# Altium PCB PCB2.PcbDoc (part 2 of 2)
Units mm, origin at the board's own origin, x right, y up, seen from the top; angles counter-clockwise.
Board outline 158 x 54 mm, 2 copper layers (Top Layer, Bottom Layer); 125 components, 171 nets, 620 pads, 62 vias.
Unrouted connection lines stored in the file: 120.
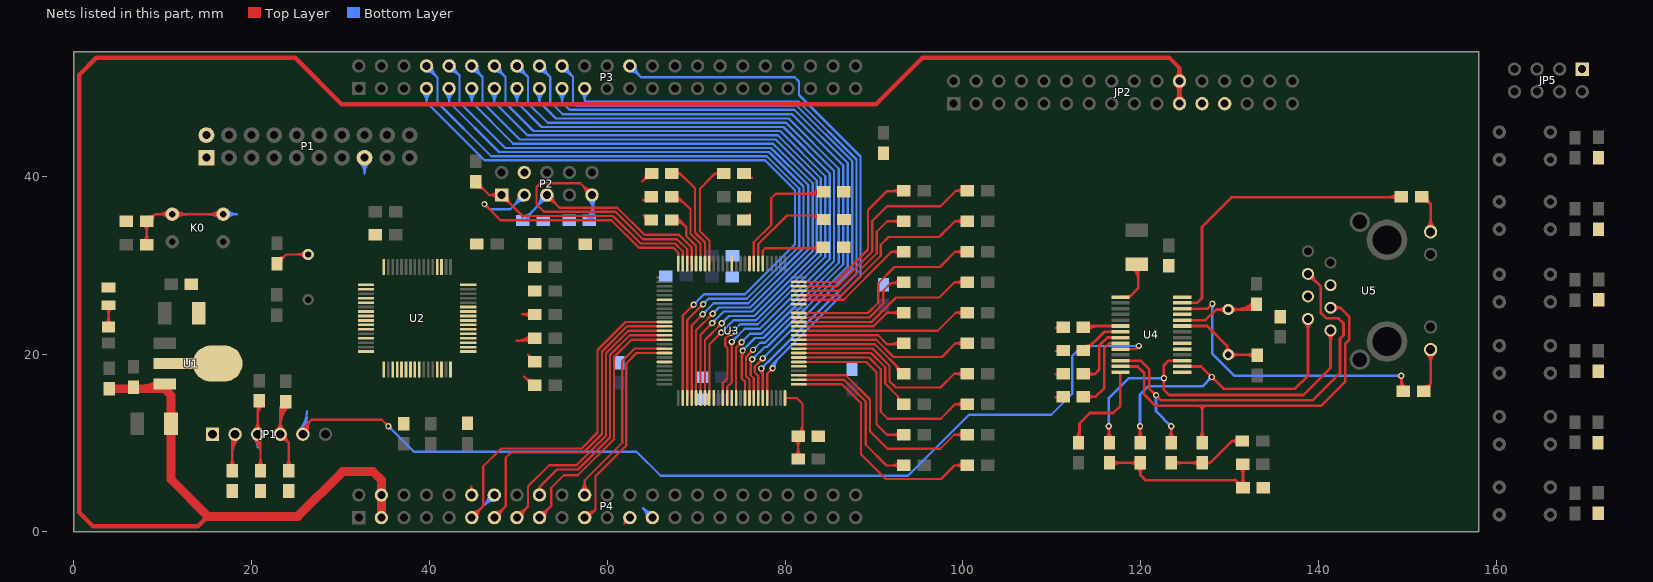
[diagram p2: the nets of this part, all layers, seen from the top]

## Via types
v1: diameter 0.7, hole 0.4, Top Layer to Bottom Layer, 62 vias

## Nets (pads, with @x,y where several pads share a name; then routed paths per layer and width w, separated by ;. In a path a pad name is that pad's centre, name@x,y a point inside that pad or via, vN(x,y) a via of type N, cw(c..) or ccw(c..) an arc to the next point about the centre after c; other vN are vias at no path point) (continued)
NetC11_2: C11.2 U2.5 Y1.2 | length 8.4
  Top Layer w0.254: C11.2@22.87,30.164 23.906,31.2 ; C11.2@22.879,30.545 ccw(c22.908,31.372) C11.2@23.493,30.787 ; C11.2@22.888,30.799 ccw(c22.935,32.171) 23.906,31.2 ; C11.2@23.378,30.291 cw(c24.298,30.291) 23.647,30.941 ; Y1.2@26.011,30.841 ccw(c25.144,29.974) 25.144,31.2 ccw(c25.144,32.426) Y1.2@26.011,31.559 ; Y1.2@26.37,31.2 23.906,31.2
NetC13_1: C13.1 U4.1 | length 9
  Top Layer w0.3: U4.1@117.705,26.405 118.725,26.405 119.71,27.39 119.71,29.959 C13.1@119.565,30.105 ; U4.1@118.53,26.455 ccw(c118.53,27.046) 118.948,26.628 ; C13.1@119.132,29.672 cw(c117.736,28.276) 119.71,28.276 ; C13.1@119.344,29.884 cw(c118.46,29) 119.71,29 ; 119.71,28.978 cw(c120.691,28.978) C13.1@119.997,29.672
NetC14_1: C14.1 U4.24 Y2.1 | length 17.6
  Top Layer w0.3: U4.24@124.655,23.805 127.295,23.805 128.5,25.01 132.41,25.01 C14.1@133.01,25.61 ; Y2.1@129.497,24.667 ccw(c128.669,23.839) 128.669,25.01 ccw(c128.669,26.181) Y2.1@129.497,25.353 ; Y2.1@130.183,24.667 cw(c131.011,23.839) 131.011,25.01 cw(c131.011,26.181) Y2.1@130.183,25.353 ; 130.697,25.01 ccw(c130.697,27.796) C14.1@132.667,25.826 ; 131.421,25.01 ccw(c131.421,27.072) C14.1@132.879,25.614 ; 132.146,25.01 ccw(c132.146,26.347) C14.1@133.091,25.402
NetC15_1: C15.1 U4.23 Y2.2 | length 15.5
  Top Layer w0.3: U4.23@124.43,23.11 124.475,23.155 127.475,23.155 129.72,20.91 ; Y2.2@129.497,20.273 ccw(c128.959,20.811) 129.72,20.811 ; Y2.2@130.057,20.364 cw(c130.331,20.91) 129.72,20.91 ; Y2.2@130.183,19.587 cw(c131.011,18.759) 131.011,19.93 cw(c131.011,21.101) Y2.2@130.183,20.273 ; 131.774,19.93 cw(c131.774,18.554) C15.1@132.747,19.527 ; 132.064,19.93 ccw(c132.064,20.896) C15.1@132.747,20.213 ; C15.1@133.09,19.87 133.03,19.93 Y2.2@129.84,19.93 129.72,20.05 129.72,20.91
NetC25_2: C25.2 L1.2 R38.1 R39.1 | length 30.4
  Top Layer w0.3: R38.1@116.473,7.758 R39.1@119.948,7.758 119.948,6.402 120.56,5.79 130.673,5.79 L1.2@131.496,4.968 131.496,7.548 C25.2@131.454,7.59 ; R38.1@116.816,7.415 cw(c117.643,6.588) 117.643,7.758 cw(c117.643,8.929) R38.1@116.816,8.101 ; R39.1@119.605,7.288 cw(c118.777,6.461) 119.948,6.461 cw(c121.118,6.461) R39.1@120.291,7.288 ; R39.1@119.605,7.415 ccw(c118.777,6.588) 118.777,7.758 ccw(c118.777,8.929) R39.1@119.605,8.101 ; 130.61,5.853 cw(c129.918,5.161) L1.2@130.888,5.032 ; 130.757,5.706 ccw(c131.369,6.317) L1.2@131.369,5.453 ; C25.2@131.111,7.247 cw(c130.183,6.319) 131.496,6.319 ; L1.2@131.153,5.311 ccw(c130.325,6.138) 131.496,6.138 ccw(c132.666,6.138) L1.2@131.839,5.311 ; 131.496,6.52 cw(c132.524,6.52) C25.2@131.797,7.247
NetC26_2: C26.2 R40.1 R41.1 | length 15.4
  Top Layer w0.3: R41.1@123.423,7.758 126.658,7.758 126.67,7.77 127.8,7.77 ; R41.1@123.766,7.415 cw(c124.593,6.588) 124.593,7.758 cw(c124.593,8.929) R41.1@123.766,8.101 ; R40.1@126.555,7.415 ccw(c125.727,6.588) 125.727,7.758 ccw(c125.727,8.929) R40.1@126.555,8.101 ; R40.1@127.297,8.034 ccw(c127.8,8.382) 127.8,7.77 ; R40.1@127.307,7.499 cw(c127.8,7.187) 127.8,7.77 ; C26.2@130.929,9.894 ccw(c130.24,9.301) 130.24,10.21 ; C26.2@130.929,10.526 cw(c130.24,11.119) 130.24,10.21 ; C26.2@131.424,10.21 130.24,10.21 ; 127.8,7.77 130.24,10.21
NetJP1_2: JP1.2 R14.1 | length 11.1
  Top Layer w0.254: R14.1@17.473,7.368 ccw(c16.606,8.235) 17.832,8.235 ccw(c19.059,8.235) R14.1@18.192,7.368 ; JP1.2@17.709,10.539 cw(c17.413,10.243) 17.832,10.243 ; R14.1@17.832,6.882 17.832,10.662 JP1.2@18.15,10.98 ; 17.832,8.709 cw(c20.421,8.709) JP1.2@18.591,10.539 ; 17.832,9.322 cw(c19.808,9.322) JP1.2@18.411,10.719 ; 17.832,9.936 cw(c19.194,9.936) JP1.2@18.231,10.899
NetLED1_1: LED1.1 R67.1 | length 5.7
  Top Layer w0.3: LED1.1@3.592,23.358 ccw(c2.775,24.175) 3.93,24.175 ; R67.1@3.647,25.207 cw(c2.964,24.524) 3.93,24.524 cw(c4.896,24.524) R67.1@4.213,25.207 ; LED1.1@3.91,23.04 3.93,23.06 R67.1@3.93,25.49 ; 3.93,24.078 ccw(c4.948,24.078) LED1.1@4.228,23.358
NetR5_1: R5.1 U2.36 | length 0.6
  Top Layer w0.254: 110.428,20.337 ccw(c110.428,21.015) R5.1@110.94,20.569 ; R5.1@111.013,20.337 R5.1@111.06,20.29
NetR6_1: R6.1 U2.35 | length 0.7
  Top Layer w0.254: 110.422,22.94 ccw(c110.422,23.62) R6.1@110.938,23.178 ; R6.1@111.186,22.94 R6.1@111.258,23.012
NetR7_2: R7.2 U2.16
NetR8_1: R8.1 U2.34 | length 0.6
  Top Layer w0.254: 110.445,17.733 ccw(c110.445,18.408) R8.1@110.944,17.953 ; R8.1@111.209,17.733 R8.1@111.258,17.782
NetR9_2: R9.2 U2.17
NetR10_1: R10.1 U2.33 | length 0.7
  Top Layer w0.254: 110.432,15.13 ccw(c110.432,15.808) R10.1@110.941,15.36 ; R10.1@111.196,15.13 R10.1@111.258,15.192
NetR11_2: R11.2 U2.20 | length 1.7
  Top Layer w0.254: R11.2@75.38,40.298 R11.2@75.868,39.81 ; R11.2@75.507,40.298 ccw(c76.282,40.67) 76.282,39.81
NetR15_2: R15.2 U2.21 | length 2.7
  Top Layer w0.254: 63.921,39.401 cw(c64.859,38.464) R15.2@64.859,39.79 ; 64.02,39.5 ccw(c63.223,40.298) R15.2@64.351,40.298 ; R15.2@64.355,39.835 cw(c64.859,39.331) R15.2@64.859,40.044 ; R15.2@64.818,40.298 R15.2@64.986,40.298
NetR16_2: R16.2 U2.22 | length 1.3
  Top Layer w0.254: 64.03,37.3 ccw(c64.03,38.337) R16.2@64.839,37.688 ; R16.2@64.49,37.3 R16.2@64.78,37.59
NetR17_2: R17.2 U2.23 | length 1.4
  Top Layer w0.254: 64.088,35.602 cw(c63.552,35.065) R17.2@64.311,35.065 ; 64.107,35.583 ccw(c64.75,36.227) R17.2@64.804,35.319
NetR18_2: R18.2 U2.41
NetR19_2: R19.2 U2.8 | length 0.7
  Top Layer w0.254: R19.2@56.866,32.786 ccw(c57.3,33.219) R19.2@57.37,32.61 ; R19.2@57.41,32.242 R19.2@57.526,32.358
NetR20_2: R20.2 U2.9 | length 0.8
  Top Layer w0.254: R20.2@51.15,32.11 ccw(c51.15,32.856) R20.2@51.739,32.398 ; R20.2@51.43,32.11 R20.2@51.55,32.23
NetR21_2: R21.2 U2.10 | length 0.8
  Top Layer w0.254: R21.2@51.146,29.455 ccw(c51.146,30.205) R21.2@51.739,29.746 ; R21.2@51.465,29.455 R21.2@51.57,29.56
NetR22_2: R22.2 U2.11 | length 1.1
  Top Layer w0.254: R22.2@51.141,26.8 ccw(c51.141,27.553) R22.2@51.739,27.094 ; R22.2@51.571,26.8 R22.2@51.866,27.094
NetR23_2: R23.2 U2.24 | length 2.5
  Top Layer w0.254: 50.446,24.47 cw(c50.446,23.15) R23.2@51.379,24.083 ; 50.578,24.47 ccw(c50.578,25.603) R23.2@51.379,24.802 ; 51.059,24.47 cw(c51.059,23.763) R23.2@51.559,24.263 ; R23.2@51.838,24.47 R23.2@51.866,24.443
NetR24_2: R24.2 U2.25 | length 4.3
  Top Layer w0.254: 49.786,21.49 ccw(c49.786,23.744) R24.2@51.379,22.15 ; 50.399,21.49 ccw(c50.399,23.131) R24.2@51.559,21.971 ; 51.012,21.49 ccw(c51.012,22.517) R24.2@51.739,21.791 ; R24.2@51.565,21.49 R24.2@51.866,21.791
NetR25_2: R25.2 U2.37 | length 1.4
  Top Layer w0.254: 51.088,19.917 ccw(c51.739,20.567) R25.2@51.739,19.647 ; 51.215,19.79 cw(c50.565,19.139) R25.2@51.485,19.139
NetR26_2: R26.2 U2.38 | length 3.1
  Top Layer w0.254: 50.673,17.437 ccw(c51.739,18.503) R26.2@51.739,16.996 ; 50.954,17.156 cw(c50.285,16.488) R26.2@51.231,16.488 ; R26.2@51.107,17.003 ccw(c51.739,17.635) R26.2@51.739,16.742 ; R26.2@51.558,16.18 R26.2@51.866,16.488
NetR27_2: R27.2 U2.39 | length 0.7
  Top Layer w0.254: R27.2@75.761,35.065 cw(c76.681,35.065) 76.03,35.715
NetR28_2: R28.2 U2.40 | length 1.4
  Top Layer w0.254: R28.2@75.38,37.688 R28.2@75.792,38.1 ; R28.2@75.507,37.688 cw(c76.216,37.284) 76.216,38.1
NetR29_1: R29.1 U4.27 | length 36.7
  Top Layer w0.3: U4.27@124.655,25.755 126.345,25.755 126.88,26.29 126.88,34.31 130.19,37.62 149.226,37.62 R29.1@149.308,37.702 ; 147.812,37.62 ccw(c147.812,39.072) R29.1@148.838,38.045 ; 148.209,37.62 cw(c148.209,36.73) R29.1@148.838,37.359 ; 148.536,37.62 ccw(c148.536,38.348) R29.1@149.051,37.833
NetR29_2: R29.2 U5.12 | length 8.2
  Top Layer w0.3: R29.2@151.723,37.217 cw(c151.726,35.97) 152.608,36.852 ; R29.2@151.93,37.53 152.59,36.87 U5.12@152.59,33.745 ; U5.12@152.166,34.169 ccw(c151.141,35.194) 152.59,35.194 ccw(c154.039,35.194) U5.12@153.014,34.169 ; R29.2@152.206,37.702 ccw(c153.29,37.702) 152.524,36.936
NetR30_1: R30.1 U4.26 | length 38.9
  Top Layer w0.3: U4.26@124.655,25.105 127.505,25.105 v1(128.05,25.65) ; v1@127.85,25.65 cw(c127.367,25.65) 127.709,25.309 cw(c128.05,24.967) v1@128.05,25.45 ; R30.1@149.058,16.165 ccw(c148.475,16.748) 149.3,16.748 ; R30.1@149.13,15.73 149.3,15.9 v1(149.3,17.55) ; v1@149.159,17.409 cw(c148.817,17.067) 149.3,17.067 cw(c149.783,17.067) v1@149.441,17.409 ; 149.3,16.514 ccw(c150.093,16.514) R30.1@149.532,15.953 ; v1@149.3,17.238 ccw(c150.817,17.238) R30.1@149.744,16.165
  Bottom Layer w0.3: v1@127.909,25.509 cw(c127.567,25.167) 128.05,25.167 cw(c128.533,25.167) v1@128.191,25.509 ; v1(128.05,25.65) 128.05,20.02 130.52,17.55 v1(149.3,17.55) ; v1@149.159,17.409 ccw(c148.817,17.067) 148.817,17.55 ccw(c148.817,18.033) v1@149.159,17.691
NetR30_2: R30.2 U5.9 | length 8.9
  Top Layer w0.3: R30.2@151.46,15.79 151.72,15.79 152.59,16.66 ; R30.2@151.941,16.307 ccw(c151.941,17.022) 152.447,16.517 ; U5.9@152.166,20.071 cw(c151.141,19.046) 152.59,19.046 cw(c154.039,19.046) U5.9@153.014,20.071 ; R30.2@152.408,15.956 cw(c153.097,16.153) 152.59,16.66 ; U5.9@152.59,20.495 152.59,16.66
NetR31_2: R31.2 U4.14 | length 14.3
  Top Layer w0.3: R31.2@112.655,10.514 ccw(c111.579,11.59) 113.1,11.59 ; R31.2@112.867,10.302 ccw(c112.304,10.865) 113.1,10.865 ; 113.1,11.095 ccw(c113.921,11.095) R31.2@113.341,10.514 ; R31.2@113.29,9.61 113.1,9.8 113.1,12.19 114.27,13.36 116.89,13.36 117.705,14.175 U4.14@117.705,17.955
NetR32_2: R32.2 U3.76 | length 29.3
  Top Layer w0.254: U3.76@81.54,16.61 86.4,16.61 88.55,14.46 88.55,8.74 91.33,5.96 97.52,5.96 99.038,7.478 R32.2@100.49,7.478 ; R32.2@100.004,7.119 ccw(c99.137,6.251) 99.137,7.478 ccw(c99.137,8.704) R32.2@100.004,7.837
NetR33_2: R33.2 U3.77 | length 20.6
  Top Layer w0.254: U3.77@81.54,17.11 86.62,17.11 89.07,14.66 89.07,9.81 91.402,7.478 R33.2@93.36,7.478 ; R33.2@92.874,7.119 ccw(c92.007,6.251) 92.007,7.478 ccw(c92.007,8.704) R33.2@92.874,7.837
NetR34_2: R34.2 U3.78 | length 27
  Top Layer w0.254: U3.78@81.54,17.61 86.83,17.61 89.55,14.89 89.55,11.32 91.51,9.36 97.46,9.36 99.009,10.909 R34.2@100.49,10.909 ; R34.2@100.004,10.55 ccw(c99.137,9.682) 99.137,10.909 ccw(c99.137,12.135) R34.2@100.004,11.268
NetR35_2: R35.2 U3.81 | length 20.6
  Top Layer w0.254: U3.81@81.54,19.11 89.12,19.11 90.29,17.94 90.29,12.09 91.471,10.909 R35.2@93.36,10.909 ; R35.2@92.874,10.55 ccw(c92.007,9.682) 92.007,10.909 ccw(c92.007,12.135) R35.2@92.874,11.268
NetR36_2: R36.2 U3.82 | length 27.2
  Top Layer w0.254: U3.82@81.54,19.61 89.45,19.61 90.77,18.29 90.77,13.5 91.54,12.73 97.51,12.73 99.12,14.34 R36.2@100.49,14.34 ; R36.2@100.004,13.981 ccw(c99.137,13.114) 99.137,14.34 ccw(c99.137,15.566) R36.2@100.004,14.699
NetR37_2: R37.2 U3.83 | length 15.1
  Top Layer w0.254: U3.83@81.54,20.11 89.67,20.11 91.27,18.51 91.27,16.68 92.74,15.21 R37.2@92.74,14.53 ; R37.2@93.252,14.34 R37.2@93.36,14.34
NetR38_2: R38.2 U4.17 U5.1 | length 49.3
  Top Layer w0.3: R38.2@116.13,10.514 ccw(c115.453,11.191) 116.41,11.191 ; v1@116.269,11.729 cw(c115.927,11.387) 116.41,11.387 cw(c116.893,11.387) v1@116.551,11.729 ; 116.41,11.493 ccw(c117.795,11.493) R38.2@116.816,10.514 ; v1(116.41,11.87) 116.41,10.107 R38.2@116.473,10.044 ; v1@122.469,17.129 cw(c122.151,16.811) 122.6,16.811 ; v1@122.469,17.411 ccw(c122.151,17.729) 122.6,17.729 ; 122.6,16.763 cw(c123.117,16.763) v1@122.751,17.129 ; 122.6,17.777 ccw(c123.117,17.777) v1@122.751,17.411 ; U4.17@124.655,19.255 123.115,19.255 122.6,18.74 122.6,15.98 123.19,15.39 138.29,15.39 141.34,18.44 U5.1@141.34,22.66 ; U5.1@140.969,22.289 cw(c140.073,21.393) 141.34,21.393 cw(c142.607,21.393) U5.1@141.711,22.289
  Bottom Layer w0.3: v1@116.269,12.011 ccw(c115.927,12.353) 116.41,12.353 ccw(c116.893,12.353) v1@116.551,12.011 ; v1(116.41,11.87) 116.41,15.05 118.63,17.27 v1(122.61,17.27) ; v1@122.469,17.129 ccw(c122.127,16.787) 122.127,17.27 ccw(c122.127,17.753) v1@122.469,17.411
NetR39_2: R39.2 U4.16 U5.2 | length 44.1
  Top Layer w0.3: R39.2@119.605,10.514 ccw(c118.855,11.264) 119.915,11.264 ; v1@119.774,11.729 cw(c119.432,11.387) 119.915,11.387 cw(c120.398,11.387) v1@120.056,11.729 ; 119.915,11.421 ccw(c121.197,11.421) R39.2@120.291,10.514 ; v1(119.915,11.87) 119.915,10.077 R39.2@119.948,10.044 ; U4.16@124.655,18.605 126.785,18.605 129.29,16.1 137.35,16.1 138.8,17.55 U5.2@138.8,23.94 ; v1@127.77,17.42 ccw(c127.288,17.42) 127.629,17.761 ccw(c127.97,18.102) v1@127.97,17.62 ; v1@127.97,17.22 cw(c127.97,16.737) 128.312,17.078 cw(c128.653,17.42) v1@128.17,17.42 ; U5.2@138.429,23.569 cw(c137.533,22.673) 138.8,22.673 cw(c140.067,22.673) U5.2@139.171,23.569
  Bottom Layer w0.3: v1@119.774,12.011 ccw(c119.432,12.353) 119.915,12.353 ccw(c120.398,12.353) v1@120.056,12.011 ; v1(119.915,11.87) 119.915,15.455 120.83,16.37 126.921,16.37 v1(127.97,17.42) ; v1@127.77,17.42 cw(c127.288,17.42) 127.629,17.078 cw(c127.97,16.737) v1@127.97,17.22
NetR40_2: R40.2 U4.13 U5.3 | length 47.7
  Top Layer w0.3: U4.13@117.705,18.605 119.655,18.605 120.39,17.87 120.39,15.44 121.66,14.17 140.27,14.17 142.98,16.88 142.98,21.14 143.46,21.62 143.46,24.19 142.45,25.2 ; R40.2@126.555,10.514 ccw(c125.727,11.342) 126.898,11.342 ccw(c128.068,11.342) R40.2@127.241,10.514 ; 126.64,14.14 126.898,13.882 ; R40.2@126.898,10.044 126.898,13.882 ; 127.155,14.14 126.898,13.882 ; U5.3@141.34,25.2 142.45,25.2 ; U5.3@141.746,24.867 cw(c142.45,24.289) 142.45,25.2 ; U5.3@141.746,25.533 ccw(c142.45,26.111) 142.45,25.2
NetR41_2: R41.2 U4.12 U5.6 | length 56.5
  Top Layer w0.3: U4.12@117.705,19.255 119.965,19.255 120.97,18.25 120.97,16.09 122.27,14.79 139.3,14.79 142.4,17.89 142.4,21.72 142.79,22.11 142.79,23.46 142.24,24.01 140.86,24.01 140.25,24.62 140.25,27.57 U5.6@138.8,29.02 ; 121.31,15.75 ccw(c121.72,16.159) v1@121.72,15.58 ; 121.407,15.653 cw(c121.134,15.38) v1@121.52,15.38 ; v1@121.72,15.18 cw(c121.72,14.794) 121.993,15.067 ; v1@121.92,15.38 ccw(c122.499,15.38) 122.09,14.97 ; R41.2@123.08,10.514 ccw(c122.258,11.336) 123.42,11.336 ; v1@123.279,11.729 cw(c122.937,11.387) 123.42,11.387 cw(c123.903,11.387) v1@123.561,11.729 ; 123.42,11.349 ccw(c124.6,11.349) R41.2@123.766,10.514 ; v1(123.42,11.87) 123.42,10.047 R41.2@123.423,10.044 ; U5.6@138.8,28.495 cw(c138.8,27.228) 139.696,28.124 cw(c140.592,29.02) U5.6@139.325,29.02
  Bottom Layer w0.3: v1@121.579,15.239 cw(c121.237,14.897) 121.72,14.897 cw(c122.203,14.897) v1@121.861,15.239 ; v1(121.72,15.38) 121.72,13.57 v1(123.42,11.87) ; v1@123.22,11.87 ccw(c122.737,11.87) 123.079,12.211 ccw(c123.42,12.553) v1@123.42,12.07
NetR42_2: R42.2 U3.84 | length 24.4
  Top Layer w0.254: U3.84@81.54,20.61 89.83,20.61 91.75,18.69 91.75,16.94 92.46,16.23 97.48,16.23 99.021,17.771 R42.2@100.49,17.771 ; R42.2@100.004,17.412 ccw(c99.137,16.545) 99.137,17.771 ccw(c99.137,18.997) R42.2@100.004,18.13
NetR43_2: R43.2 U3.85 | length 16
  Top Layer w0.254: U3.85@81.54,21.11 90.07,21.11 93.36,17.82 R43.2@93.36,17.771 ; 92.241,18.939 cw(c91.074,17.771) R43.2@92.725,17.771 ; 92.666,18.514 ccw(c93.233,19.081) R43.2@93.233,18.279 ; 92.675,18.505 cw(c91.941,17.771) R43.2@92.979,17.771
NetR44_2: R44.2 U3.86 | length 22.2
  Top Layer w0.254: U3.86@81.54,21.61 90.26,21.61 92.2,19.67 97.64,19.67 99.172,21.202 ; R44.2@99.996,20.851 ccw(c99.172,20.06) 99.172,21.202 ; R44.2@99.996,21.554 cw(c99.172,22.344) 99.172,21.202 ; R44.2@100.49,21.202 99.172,21.202
NetR45_2: R45.2 U3.87 | length 14.9
  Top Layer w0.254: U3.87@81.54,22.11 90.47,22.11 91.47,21.11 93.268,21.11 R45.2@93.36,21.202 ; 91.784,21.11 ccw(c91.784,22.651) R45.2@92.874,21.561 ; 92.229,21.11 cw(c92.229,20.198) R45.2@92.874,20.843 ; 92.397,21.11 ccw(c92.397,22.038) R45.2@93.053,21.382
NetR46_2: R46.2 U3.88 | length 21.6
  Top Layer w0.254: U3.88@81.54,22.61 97.16,22.61 99.183,24.633 ; R46.2@99.994,24.284 ccw(c99.183,23.517) 99.183,24.633 ; R46.2@99.994,24.982 cw(c99.183,25.749) 99.183,24.633 ; R46.2@100.49,24.633 99.183,24.633
NetR47_2: R47.2 U3.89 | length 14.4
  Top Layer w0.254: U3.89@81.54,23.11 89.94,23.11 91.463,24.633 R47.2@93.36,24.633 ; R47.2@92.874,24.274 ccw(c92.007,23.407) 92.007,24.633 ccw(c92.007,25.86) R47.2@92.874,24.992
NetR48_2: R48.2 U3.90 | length 22.7
  Top Layer w0.254: U3.90@81.54,23.61 89.71,23.61 92.47,26.37 97.35,26.37 99.044,28.064 R48.2@100.49,28.064 ; R48.2@100.004,27.705 ccw(c99.137,26.838) 99.137,28.064 ccw(c99.137,29.291) R48.2@100.004,28.424
NetR49_2: R49.2 U3.91 | length 16.8
  Top Layer w0.254: U3.91@81.54,24.11 89.49,24.11 91.05,25.67 91.05,27.11 91.92,27.98 ; 92.21,27.98 cw(c92.21,27.041) R49.2@92.874,27.705 ; 92.483,27.98 ccw(c92.483,28.726) R49.2@93.043,28.232 ; R49.2@92.852,28.4 cw(c91.92,29.223) 91.92,27.98 ; R49.2@93.36,28.064 93.36,27.98 91.92,27.98
NetR50_2: R50.2 U3.92 | length 25
  Top Layer w0.254: U3.92@81.54,24.61 89.32,24.61 90.47,25.76 90.47,27.97 92.3,29.8 97.41,29.8 99.105,31.495 R50.2@100.49,31.495 ; R50.2@100.004,31.136 ccw(c99.137,30.269) 99.137,31.495 ccw(c99.137,32.722) R50.2@100.004,31.855
NetR51_2: R51.2 U3.95 | length 16
  Top Layer w0.254: U3.95@81.54,26.11 86.59,26.11 91.27,30.79 91.975,31.495 R51.2@93.36,31.495 ; R51.2@92.874,31.136 ccw(c92.007,30.269) 92.007,31.495 ccw(c92.007,32.722) R51.2@92.874,31.855
NetR52_2: R52.2 U3.96 | length 25
  Top Layer w0.254: U3.96@81.54,26.61 86.34,26.61 90.77,31.04 90.77,32.28 91.64,33.15 97.32,33.15 99.096,34.926 R52.2@100.49,34.926 ; R52.2@100.004,34.567 ccw(c99.137,33.7) 99.137,34.926 ccw(c99.137,36.153) R52.2@100.004,35.286
NetR53_2: R53.2 U3.97 | length 18.4
  Top Layer w0.254: U3.97@81.54,27.11 86.1,27.11 90.31,31.32 90.31,33.76 91.476,34.926 R53.2@93.36,34.926 ; R53.2@92.874,34.567 ccw(c92.007,33.7) 92.007,34.926 ccw(c92.007,36.153) R53.2@92.874,35.286
NetR54_2: R54.2 U3.98 | length 27.1
  Top Layer w0.254: U3.98@81.54,27.61 85.9,27.61 89.81,31.52 89.81,34.97 91.45,36.61 97.48,36.61 99.228,38.358 ; R54.2@99.984,38.019 ccw(c99.228,37.343) 99.228,38.358 ; R54.2@99.984,38.696 cw(c99.228,39.372) 99.228,38.358 ; R54.2@100.49,38.358 99.228,38.358
NetR55_2: R55.2 U3.99 | length 21.2
  Top Layer w0.254: U3.99@81.54,28.11 85.68,28.11 89.33,31.76 89.33,36.2 91.45,38.32 93.322,38.32 R55.2@93.36,38.358 ; 91.916,38.32 ccw(c91.916,39.675) R55.2@92.874,38.717 ; 92.097,38.32 cw(c92.097,37.222) R55.2@92.874,37.998 ; 92.529,38.32 ccw(c92.529,39.061) R55.2@93.053,38.537
NetR59_2: 
NRST: C7.2 JP1.5 K0.2 K0.3 P1.15 R2.2 U2.7 U4.10 | length 169.1
  Top Layer w0.254: R2.2@7.845,34.573 cw(c6.978,33.706) 8.204,33.706 cw(c9.431,33.706) R2.2@8.564,34.573 ; C7.2@7.847,32.659 ccw(c6.983,33.523) 8.204,33.523 ; R2.2@8.18,34.71 9.2,35.73 ; 8.204,33.53 ccw(c9.436,33.53) C7.2@8.565,32.659 ; R2.2@8.204,34.932 8.204,32.302 C7.2@8.206,32.3 ; R2.2@8.357,35.185 ccw(c8.414,35.758) R2.2@8.821,35.351 ; R2.2@8.382,35.438 ccw(c8.483,36.447) 9.2,35.73 ; R2.2@8.839,34.932 cw(c9.894,34.932) 9.148,35.678 ; K0.3@10.632,35.281 ccw(c9.548,34.197) 9.548,35.73 ccw(c9.548,37.263) K0.3@10.632,36.179 ; K0.3@10.811,35.461 ccw(c10.161,34.81) 10.161,35.73 ccw(c10.161,36.65) K0.3@10.811,35.999 ; K0.3@11.35,35.461 cw(c12,34.81) 12,35.73 cw(c12,36.65) K0.3@11.35,35.999 ; K0.3@11.53,35.281 cw(c12.614,34.197) 12.614,35.73 cw(c12.614,37.263) K0.3@11.53,36.179 ; K0.2@16.372,35.281 ccw(c15.288,34.197) 15.288,35.73 ccw(c15.288,37.263) K0.2@16.372,36.179 ; K0.2@16.552,35.461 ccw(c15.901,34.81) 15.901,35.73 ccw(c15.901,36.65) K0.2@16.552,35.999 ; K0.2@16.821,35.73 9.2,35.73 ; JP1.5@25.77,10.98 25.77,11.65 26.74,12.62 ; JP1.5@25.88,11.013 cw(c26.852,11.299) 26.136,12.016 ; JP1.5@26.124,11.084 cw(c27.318,11.437) 26.438,12.318 ; JP1.5@26.368,11.156 cw(c27.785,11.575) 26.74,12.62 ; v1@35.167,11.87 ccw(c34.629,11.87) 35.009,12.251 ccw(c35.39,12.631) v1@35.39,12.093 ; v1(35.39,11.87) 34.64,12.62 26.74,12.62 ; U4.10@117.705,20.555 119.435,20.555 ; v1@119.567,20.899 cw(c119.114,20.876) 119.435,20.555 ; v1@119.779,20.687 ccw(c119.756,20.234) 119.435,20.555 ; v1(119.79,20.91) 119.435,20.555
  Bottom Layer w0.254: K0.3@11.35,35.461 cw(c12,34.81) 12,35.73 cw(c12,36.65) K0.3@11.35,35.999 ; K0.3@11.53,35.281 cw(c12.614,34.197) 12.614,35.73 cw(c12.614,37.263) K0.3@11.53,36.179 ; K0.2@16.372,35.281 ccw(c15.288,34.197) 15.288,35.73 ccw(c15.288,37.263) K0.2@16.372,36.179 ; K0.2@16.552,35.461 ccw(c15.901,34.81) 15.901,35.73 ccw(c15.901,36.65) K0.2@16.552,35.999 ; K0.2@17.09,35.461 cw(c17.741,34.81) 17.741,35.73 cw(c17.741,36.65) K0.2@17.09,35.999 ; K0.2@17.27,35.281 cw(c18.354,34.197) 18.354,35.73 cw(c18.354,37.263) K0.2@17.27,36.179 ; JP1.5@25.329,11.421 ccw(c23.155,13.595) 26.23,13.595 ; JP1.5@25.509,11.241 ccw(c23.769,12.981) 26.23,12.981 ; JP1.5@25.61,10.82 JP1.5@26.23,11.44 ; JP1.5@25.689,11.061 ccw(c24.382,12.368) 26.23,12.368 ; JP1.5@25.868,10.882 ccw(c24.995,11.755) 26.23,11.755 ; P1.15@32.167,41.541 cw(c30.866,40.24) 32.705,40.24 cw(c34.545,40.24) P1.15@33.244,41.541 ; P1.15@32.346,41.721 cw(c31.479,40.854) 32.705,40.854 cw(c33.932,40.854) P1.15@33.065,41.721 ; v1@35.39,11.647 cw(c35.39,11.06) 35.805,11.475 ; v1(35.39,11.87) 35.41,11.87 38.26,9.02 63.3,9.02 66.01,6.31 93.81,6.31 100.67,13.17 109.93,13.17 112.304,15.544 112.304,19.774 113.44,20.91 v1(119.79,20.91) ; v1@35.613,11.87 ccw(c36.103,11.87) 35.757,11.523 ; v1@119.632,20.752 ccw(c119.252,20.372) 119.252,20.91 ccw(c119.252,21.448) v1@119.632,21.068
OUT_C\S\: R18.1 U3.6 | length 11.1
  Top Layer w0.254: U3.6@77.49,30.16 77.49,31.6 77.78,31.89 84.206,31.89 R18.1@84.308,31.992 ; 82.708,31.89 ccw(c82.708,33.466) R18.1@83.822,32.352 ; 83.202,31.89 cw(c83.202,31.013) R18.1@83.822,31.633 ; 83.321,31.89 ccw(c83.321,32.853) R18.1@84.002,32.172
OUT_C\S\-O: P4.15 U3.38 | length 35.8
  Top Layer w0.254: P4.15@49.84,1.604 51.1,2.864 51.1,5.12 53.48,7.5 56.554,7.5 59.86,10.806 59.86,20.09 62.38,22.61 U3.38@66.44,22.61 ; P4.15@49.84,1.973 ccw(c49.84,2.864) 50.47,2.234 ccw(c51.1,1.604) P4.15@50.209,1.604 ; P4.15@49.84,2.227 ccw(c49.84,3.731) 50.903,2.668 ccw(c51.967,1.604) P4.15@50.463,1.604
PA0: P3.14 U3.61 | length 80.6
  Top Layer w0.254: U3.61@72.99,15.06 72.99,16.74 73.52,17.27 73.52,20.66 73.28,20.9 73.28,21.71 v1(73.95,22.38) ; v1@73.727,22.38 cw(c73.189,22.38) 73.569,21.999 cw(c73.95,21.619) v1@73.95,22.157
  Bottom Layer w0.254: P3.14@47.3,51.777 cw(c47.3,50.273) 48.363,51.336 cw(c49.427,52.4) P3.14@47.923,52.4 ; P3.14@47.3,52.031 cw(c47.3,51.14) 47.93,51.77 cw(c48.56,52.4) P3.14@47.669,52.4 ; P3.14@47.3,52.4 48.55,51.15 48.55,48.23 51.71,45.07 79.45,45.07 84.52,40 84.52,30.93 76.94,23.35 74.92,23.35 v1(73.95,22.38) ; v1@73.95,22.603 ccw(c73.95,23.141) 74.331,22.761 ccw(c74.711,22.38) v1@74.173,22.38
PA1: P3.13 U3.58 | length 78.6
  Top Layer w0.254: U3.58@71.49,15.06 71.49,21.09 v1(72.81,22.41) ; v1@72.587,22.41 cw(c72.049,22.41) 72.429,22.029 cw(c72.81,21.649) v1@72.81,22.187
  Bottom Layer w0.254: P3.13@46.859,49.419 cw(c45.796,48.356) 47.3,48.356 cw(c48.804,48.356) P3.13@47.74,49.419 ; P3.13@47.039,49.599 cw(c46.409,48.969) 47.3,48.969 cw(c48.191,48.969) P3.13@47.561,49.599 ; P3.13@47.3,49.86 47.3,48.34 51.03,44.61 79.17,44.61 84.02,39.76 84.02,31.1 76.73,23.81 74.21,23.81 v1(72.81,22.41) ; v1@72.81,22.633 ccw(c72.81,23.171) 73.191,22.791 ccw(c73.571,22.41) v1@73.033,22.41
PA2: P3.12 U3.57 | length 82.6
  Top Layer w0.254: U3.57@70.99,15.06 70.99,21.58 v1(72.87,23.46) ; v1@72.647,23.46 cw(c72.109,23.46) 72.489,23.079 cw(c72.87,22.699) v1@72.87,23.237
  Bottom Layer w0.254: P3.12@44.76,51.777 cw(c44.76,50.321) 45.789,51.351 ; P3.12@44.76,52.031 cw(c44.76,51.188) 45.356,51.784 ; P3.12@44.76,52.4 44.76,52.38 45.98,51.16 45.98,48.31 50.16,44.13 78.95,44.13 83.56,39.52 83.56,31.31 76.54,24.29 73.7,24.29 v1(72.87,23.46) ; P3.12@45.129,52.4 ccw(c46.068,52.4) 45.404,51.736 ; P3.12@45.383,52.4 ccw(c46.935,52.4) 45.838,51.302 ; v1@72.87,23.683 ccw(c72.87,24.221) 73.251,23.841 ccw(c73.631,23.46) v1@73.093,23.46
PA3: P3.11 U3.56 | length 80.3
  Top Layer w0.254: U3.56@70.49,15.06 70.49,22.17 v1(71.8,23.48) ; v1@71.577,23.48 cw(c71.039,23.48) 71.419,23.099 cw(c71.8,22.719) v1@71.8,23.257
  Bottom Layer w0.254: P3.11@44.319,49.419 cw(c43.256,48.356) 44.76,48.356 cw(c46.264,48.356) P3.11@45.2,49.419 ; P3.11@44.499,49.599 cw(c43.869,48.969) 44.76,48.969 cw(c45.651,48.969) P3.11@45.021,49.599 ; P3.11@44.76,49.86 44.76,48.33 49.44,43.65 78.65,43.65 83.1,39.2 83.1,31.58 76.3,24.78 73.1,24.78 v1(71.8,23.48) ; v1@71.8,23.703 ccw(c71.8,24.241) 72.181,23.861 ccw(c72.561,23.48) v1@72.023,23.48
PA4: P3.10 U3.55 | length 83.8
  Top Layer w0.254: U3.55@69.99,15.06 69.99,22.66 v1(71.86,24.53) ; v1@71.637,24.53 cw(c71.099,24.53) 71.479,24.149 cw(c71.86,23.769) v1@71.86,24.307
  Bottom Layer w0.254: P3.10@42.22,52.031 cw(c42.222,50.928) 43.002,51.708 ; P3.10@42.22,52.4 42.31,52.4 43.39,51.32 43.39,48.32 48.53,43.18 78.42,43.18 82.6,39 82.6,31.75 76.09,25.24 72.57,25.24 v1(71.86,24.53) ; P3.10@42.221,51.777 cw(c42.223,50.063) 43.435,51.275 ; P3.10@42.843,52.4 ccw(c44.13,52.4) 43.22,51.49 ; v1@71.86,24.753 ccw(c71.86,25.291) 72.241,24.911 ccw(c72.621,24.53) v1@72.083,24.53
PA5: P3.9 U3.54 | length 82
  Top Layer w0.254: U3.54@69.49,15.06 69.49,23.22 v1(70.74,24.47) ; v1@70.517,24.47 cw(c69.979,24.47) 70.359,24.089 cw(c70.74,23.709) v1@70.74,24.247
  Bottom Layer w0.254: P3.9@41.779,49.419 cw(c40.716,48.356) 42.22,48.356 cw(c43.724,48.356) P3.9@42.66,49.419 ; P3.9@41.959,49.599 cw(c41.329,48.969) 42.22,48.969 cw(c43.111,48.969) P3.9@42.481,49.599 ; P3.9@42.22,49.86 42.22,48.32 47.82,42.72 78.18,42.72 82.07,38.83 82.07,31.93 75.86,25.72 71.99,25.72 v1(70.74,24.47) ; v1@70.74,24.693 ccw(c70.74,25.231) 71.121,24.851 ccw(c71.501,24.47) v1@70.963,24.47
PA6: P3.8 U3.53 | length 85.5
  Top Layer w0.254: U3.53@68.99,15.06 68.99,23.82 v1(70.78,25.61) ; v1@70.557,25.61 cw(c70.019,25.61) 70.399,25.229 cw(c70.78,24.849) v1@70.78,25.387
  Bottom Layer w0.254: P3.8@39.68,51.777 cw(c39.68,50.514) 40.573,51.407 ; P3.8@39.68,52.4 39.68,52.3 40.92,51.06 40.92,48.28 46.96,42.24 77.95,42.24 81.59,38.6 81.59,32.11 75.69,26.21 71.38,26.21 v1(70.78,25.61) ; P3.8@40.049,52.4 ccw(c41.181,52.4) 40.381,51.599 ; P3.8@40.303,52.4 ccw(c42.048,52.4) 40.814,51.166 ; v1@70.78,25.833 ccw(c70.78,26.371) 71.161,25.991 ccw(c71.541,25.61) v1@71.003,25.61
PA7: P3.7 U3.52 | length 83.8
  Top Layer w0.254: U3.52@68.49,15.06 68.49,24.32 v1(69.71,25.54) ; v1@69.487,25.54 cw(c68.949,25.54) 69.329,25.159 cw(c69.71,24.779) v1@69.71,25.317
  Bottom Layer w0.254: P3.7@39.239,49.419 cw(c38.176,48.356) 39.68,48.356 cw(c41.184,48.356) P3.7@40.12,49.419 ; P3.7@39.419,49.599 cw(c38.789,48.969) 39.68,48.969 cw(c40.571,48.969) P3.7@39.941,49.599 ; P3.7@39.68,49.86 39.68,48.31 46.21,41.78 77.74,41.78 81.11,38.41 81.11,32.34 75.49,26.72 70.89,26.72 v1(69.71,25.54) ; v1@69.71,25.763 ccw(c69.71,26.301) 70.091,25.921 ccw(c70.471,25.54) v1@69.933,25.54
PB0: P3.15 U3.62 | length 76.3
  Top Layer w0.254: U3.62@73.49,15.06 73.49,16.31 73.99,16.81 v1(73.99,21.36) ; v1@73.832,21.202 cw(c73.452,20.822) 73.99,20.822 cw(c74.528,20.822) v1@74.148,21.202
  Bottom Layer w0.254: P3.15@49.399,49.419 cw(c48.336,48.356) 49.84,48.356 cw(c51.344,48.356) P3.15@50.28,49.419 ; P3.15@49.579,49.599 cw(c48.949,48.969) 49.84,48.969 cw(c50.731,48.969) P3.15@50.101,49.599 ; P3.15@49.84,49.86 49.84,48.31 52.62,45.53 79.81,45.53 85.03,40.31 85.03,30.69 77.19,22.85 75.47,22.85 v1@74.19,21.57 ; v1@73.99,21.583 ccw(c73.99,22.097) 74.354,21.734 ; v1@74.213,21.36 cw(c74.776,21.36) 74.378,21.758
PB1: P3.16 U3.64 | length 78.6
  Top Layer w0.254: U3.64@74.49,15.06 74.49,20.71 v1(75.11,21.33) ; v1@74.887,21.33 cw(c74.349,21.33) 74.729,20.949 cw(c75.11,20.569) v1@75.11,21.107
  Bottom Layer w0.254: P3.16@49.84,51.777 cw(c49.84,50.273) 50.903,51.336 cw(c51.967,52.4) P3.16@50.463,52.4 ; P3.16@49.84,52.031 cw(c49.84,51.14) 50.47,51.77 cw(c51.1,52.4) P3.16@50.209,52.4 ; P3.16@49.84,52.4 51.09,51.15 51.09,48.21 53.3,46 80.11,46 85.51,40.6 85.51,30.44 77.35,22.28 76.06,22.28 v1(75.11,21.33) ; v1@75.11,21.553 ccw(c75.11,22.091) 75.491,21.711 ccw(c75.871,21.33) v1@75.333,21.33
PB2: P3.17 U3.66 | length 74.7
  Top Layer w0.254: v1@75.062,20.232 cw(c74.875,20.045) 75.14,20.045 ; 75.14,19.658 cw(c75.952,19.658) v1@75.378,20.232 ; v1(75.22,20.39) 75.14,20.31 75.14,17.26 75.49,16.91 U3.66@75.49,15.06
  Bottom Layer w0.254: P3.17@51.939,49.419 cw(c50.876,48.356) 52.38,48.356 cw(c53.884,48.356) P3.17@52.82,49.419 ; P3.17@52.119,49.599 cw(c51.489,48.969) 52.38,48.969 cw(c53.271,48.969) P3.17@52.641,49.599 ; P3.17@52.38,49.86 52.38,48.34 54.24,46.48 80.4,46.48 86.03,40.85 86.03,30.26 77.57,21.8 76.63,21.8 v1(75.22,20.39) ; v1@75.22,20.613 ccw(c75.22,21.151) 75.601,20.771 ccw(c75.981,20.39) v1@75.443,20.39
PB3: P3.18 U3.67 | length 77
  Top Layer w0.254: U3.67@75.99,15.06 75.99,17.1 75.594,17.496 75.594,19.664 v1(76.39,20.46) ; v1@76.167,20.46 cw(c75.629,20.46) 76.009,20.079 cw(c76.39,19.699) v1@76.39,20.237
  Bottom Layer w0.254: P3.18@52.38,51.777 cw(c52.38,50.369) 53.375,51.365 ; P3.18@52.38,52.031 cw(c52.38,51.237) 52.942,51.798 ; P3.18@52.38,52.4 52.38,52.36 53.6,51.14 53.6,48.37 55.01,46.96 80.77,46.96 86.54,41.19 86.54,30.09 77.73,21.28 77.21,21.28 v1(76.39,20.46) ; P3.18@52.749,52.4 ccw(c53.736,52.4) 53.038,51.702 ; P3.18@53.003,52.4 ccw(c54.603,52.4) 53.472,51.268 ; v1@76.39,20.683 ccw(c76.39,21.221) 76.771,20.841 ccw(c77.151,20.46) v1@76.613,20.46
PB4: P3.19 U3.68 | length 72.3
  Top Layer w0.254: v1(76.32,19.41) 76.14,19.23 76.14,17.62 76.49,17.27 U3.68@76.49,15.06
  Bottom Layer w0.254: P3.19@54.479,49.419 cw(c53.416,48.356) 54.92,48.356 cw(c56.424,48.356) P3.19@55.36,49.419 ; P3.19@54.659,49.599 cw(c54.029,48.969) 54.92,48.969 cw(c55.811,48.969) P3.19@55.181,49.599 ; P3.19@54.92,49.86 54.92,48.3 55.75,47.47 81.04,47.47 87.04,41.47 87.04,29.87 77.96,20.79 77.7,20.79 v1(76.32,19.41) ; v1@76.32,19.633 ccw(c76.32,20.171) 76.701,19.791 ccw(c77.081,19.41) v1@76.543,19.41
PB5: P3.20 U3.69 | length 75.5
  Top Layer w0.254: U3.69@76.99,15.06 76.99,17.52 76.594,17.916 76.594,18.604 v1(77.5,19.51) ; v1@77.277,19.51 cw(c76.739,19.51) 77.119,19.129 cw(c77.5,18.749) v1@77.5,19.287
  Bottom Layer w0.254: P3.20@54.92,51.777 cw(c54.92,50.273) 55.983,51.336 cw(c57.047,52.4) P3.20@55.543,52.4 ; P3.20@54.92,52.031 cw(c54.92,51.14) 55.55,51.77 cw(c56.18,52.4) P3.20@55.289,52.4 ; P3.20@54.92,52.4 56.14,51.18 56.14,48.28 56.496,47.924 81.316,47.924 87.54,41.7 87.54,29.55 78.29,20.3 78.29,20.28 ; v1(77.5,19.51) 78.28,20.29 ; v1@77.5,19.733 ccw(c77.5,20.271) 77.881,19.891 ccw(c78.261,19.51) v1@77.723,19.51
PB6: P3.21 U3.70 | length 70.8
  Top Layer w0.254: v1@77.172,18.212 cw(c76.405,17.445) 77.49,17.445 ; v1(77.33,18.37) 77.49,18.21 U3.70@77.49,15.06
  Bottom Layer w0.254: P3.21@57.058,49.384 cw(c56.331,48.52) 57.46,48.52 ; P3.21@57.222,49.578 cw(c56.791,49.066) 57.46,49.066 cw(c58.129,49.066) P3.21@57.698,49.578 ; P3.21@57.46,49.86 57.46,48.52 ; P3.21@57.861,49.384 ccw(c58.589,48.52) 57.46,48.52 ; v1(77.33,18.37) 78.75,19.79 78.76,19.79 88.03,29.06 88.03,41.88 81.532,48.378 57.602,48.378 57.46,48.52 ; v1@77.33,18.593 ccw(c77.33,19.131) 77.711,18.751 ccw(c78.091,18.37) v1@77.553,18.37
PB7: P3.26 U3.71 | length 69.9
  Top Layer w0.254: U3.71@77.99,15.06 77.99,17.8 v1(78.6,18.41) ; v1@78.377,18.41 cw(c77.839,18.41) 78.219,18.029 cw(c78.6,17.649) v1@78.6,18.187
  Bottom Layer w0.254: P3.26@62.54,51.777 cw(c62.54,50.273) 63.603,51.336 cw(c64.667,52.4) P3.26@63.163,52.4 ; P3.26@62.54,52.031 cw(c62.54,51.14) 63.17,51.77 cw(c63.8,52.4) P3.26@62.909,52.4 ; P3.26@62.54,52.4 63.81,51.13 81.09,51.13 81.56,50.66 81.56,49.13 88.49,42.2 88.49,28.75 78.615,18.875 ; v1@78.47,18.591 ccw(c78.265,18.875) 78.615,18.875 ; v1@78.569,18.41 cw(c79.581,18.41) 78.865,19.125 ; v1@78.615,18.395 78.615,18.875 ; v1@78.749,18.576 cw(c79.016,18.875) 78.615,18.875 ; v1@78.823,18.41 cw(c80.448,18.41) 79.299,19.559
R\S\T\: U2.4
RST_N: C28.2 R56.1 U2.2 U3.75 | length 15
  Top Layer w0.254: U3.75@79.99,15.06 81.3,15.06 81.96,14.4 81.96,11.244 R56.1@81.458,10.742 C28.2@81.458,8.2 ; R56.1@81.099,10.383 cw(c80.232,9.516) 81.458,9.516 cw(c82.685,9.516) R56.1@81.818,10.383 ; C28.2@81.105,8.559 ccw(c80.251,9.413) 81.458,9.413 ; R56.1@81.406,10.922 ccw(c80.068,12.26) 81.96,12.26 ; 81.458,9.44 ccw(c82.704,9.44) C28.2@81.823,8.559 ; R56.1@81.585,10.742 ccw(c80.681,11.647) 81.96,11.647
SPI1-MISO: R16.1 U3.20 | length 11.9
  Top Layer w0.254: R16.1@67.252,37.688 67.942,37.688 69.36,36.27 69.36,33.52 70.49,32.39 U3.20@70.49,30.16 ; R16.1@67.379,37.434 cw(c67.379,35.459) 68.775,36.855 ; R16.1@67.379,37.688 cw(c67.379,36.326) 68.341,37.289
SPI1-MISO-O: P4.21 U3.43 | length 26.9
  Top Layer w0.254: P4.21@57.46,1.604 57.764,1.604 58.68,2.52 ; P4.21@57.543,1.963 ccw(c57.74,2.813) 58.356,2.196 ; P4.21@57.601,2.211 ccw(c57.862,3.338) 58.68,2.52 ; P4.21@58.083,1.604 cw(c58.853,1.604) 58.308,2.148 ; U3.43@66.44,20.11 63.3,20.11 62.13,18.94 62.13,9.71 58.68,6.26 58.68,2.52
SPI1-MOSI: R17.1 U3.21 | length 13.7
  Top Layer w0.254: R17.1@67.232,35.065 68.115,35.065 ; R17.1@67.329,35.317 cw(c67.445,34.332) 68.147,35.033 ; R17.1@67.388,34.813 cw(c67.601,33.006) 68.888,34.292 ; R17.1@67.534,34.881 cw(c67.916,34.478) 68.309,34.871 ; R17.1@67.709,34.697 cw(c68.096,34.289) 68.493,34.687 ; R17.1@67.829,34.873 cw(c68.115,34.756) 68.115,35.065 ; R17.1@67.829,35.257 ccw(c68.115,35.374) 68.115,35.065 ; 68.125,35.055 ccw(c67.737,34.667) 67.359,35.065 cw(c67.523,33.669) 68.517,34.663 ; U3.21@69.99,30.16 69.99,32.15 68.88,33.26 68.88,34.3 68.115,35.065
SPI1-MOSI-O: P4.18 U3.39 | length 28.3
  Top Layer w0.254: P4.18@52.157,4.726 ccw(c52.033,5.05) 52.38,5.05 ; P4.18@52.38,4.144 52.38,5.05 ; P4.18@52.603,4.726 cw(c52.727,5.05) 52.38,5.05 ; U3.39@66.44,22.11 62.54,22.11 60.314,19.884 60.314,10.618 56.716,7.02 54.35,7.02 52.38,5.05
SPI1-NSS: R11.1 U3.18 | length 13.2
  Top Layer w0.254: U3.18@71.49,30.16 71.49,32.74 70.42,33.81 70.42,38.59 72.128,40.298 ; R11.1@72.517,40.062 ccw(c72.128,39.858) 72.128,40.298 ; R11.1@72.517,40.533 cw(c72.128,40.737) 72.128,40.298 ; R11.1@73.094,40.298 72.128,40.298
SPI1-NSS-O: P4.17 U3.40 | length 32.7
  Top Layer w0.254: P4.17@52.38,1.604 53.69,2.914 53.69,4.95 55.1,6.36 56.698,6.36 60.768,10.43 60.768,19.658 62.72,21.61 U3.40@66.44,21.61 ; P4.17@52.38,1.973 ccw(c52.38,2.864) 53.01,2.234 ccw(c53.64,1.604) P4.17@52.749,1.604 ; P4.17@52.38,2.227 ccw(c52.38,3.731) 53.443,2.668 ccw(c54.507,1.604) P4.17@53.003,1.604
SPI1-SCK: R15.1 U3.19 | length 13.1
  Top Layer w0.254: R15.1@67.272,40.298 68.192,40.298 ; R15.1@67.86,40.085 cw(c68.192,39.931) 68.192,40.298 ; R15.1@67.86,40.51 ccw(c68.192,40.664) 68.192,40.298 ; U3.19@70.99,30.16 70.99,32.55 69.86,33.68 69.86,38.63 68.192,40.298
SPI1-SCK-O: P4.22 U3.42 | length 25.9
  Top Layer w0.254: P4.22@57.019,4.585 ccw(c55.956,5.648) 57.46,5.648 ccw(c58.964,5.648) P4.22@57.9,4.585 ; P4.22@57.199,4.405 ccw(c56.569,5.035) 57.46,5.035 ccw(c58.351,5.035) P4.22@57.721,4.405 ; P4.22@57.46,4.144 57.46,5.82 61.676,10.036 61.676,19.206 63.08,20.61 U3.42@66.44,20.61
SPI2-MISO: R6.2 U4.6 | length 6.7
  Top Layer w0.3: R6.2@113.544,23.155 U4.6@117.705,23.155 ; R6.2@113.802,22.882 cw(c114.462,22.221) 114.462,23.155 ; R6.2@114.014,22.669 cw(c115.187,21.497) 115.187,23.155 ; R6.2@114.014,23.355 ccw(c114.498,23.839) 114.498,23.155
SPI2-MOSI: R5.2 U4.7 | length 7.3
  Top Layer w0.3: R5.2@113.671,20.587 ccw(c113.671,21.35) R5.2@114.211,20.811 ; R5.2@113.671,20.887 ccw(c113.671,22.375) 114.723,21.323 ; R5.2@113.78,20.36 113.78,20.38 115.905,22.505 U4.7@117.705,22.505 ; R5.2@114.156,20.402 cw(c115.011,20.402) 114.407,21.007
SPI2-NSS: R10.2 U4.9 | length 11.3
  Top Layer w0.3: R10.2@113.324,15.192 113.332,15.2 114.92,15.2 115.91,16.19 115.91,20.67 116.445,21.205 U4.9@117.705,21.205 ; R10.2@114.014,14.849 cw(c114.861,14.003) 114.861,15.2 ; R10.2@114.014,15.535 ccw(c114.824,16.345) 114.824,15.2
SPI2-SCK: R8.2 U4.8 | length 9
  Top Layer w0.3: R8.2@113.544,17.782 113.617,17.71 114.78,17.71 ; R8.2@114.014,17.439 cw(c114.668,16.786) 114.668,17.71 ; R8.2@114.061,18.072 ccw(c114.78,18.606) 114.78,17.71 ; U4.8@117.705,21.855 116.245,21.855 115.33,20.94 115.33,18.26 114.78,17.71
TCK: P2.1 R60.2 U3.24 | length 37.7
  Top Layer w0.254: R60.2@45.222,38.751 cw(c45.222,37.218) 46.306,38.302 ; R60.2@45.222,39.005 cw(c45.222,38.085) 45.873,38.735 ; R60.2@45.222,39.386 46.728,37.88 ; R60.2@45.73,39.259 ccw(c46.65,39.259) 46,38.608 ; P2.1@47.668,37.462 ccw(c46.728,36.614) 46.728,37.88 ; P2.1@47.668,38.298 cw(c46.728,39.146) 46.728,37.88 ; P2.1@47.856,37.633 ccw(c47.3,37.13) 47.3,37.88 ccw(c47.3,38.63) P2.1@47.856,38.127 ; P2.1@48.13,37.257 cw(c48.13,35.753) 49.194,36.816 cw(c50.257,37.88) P2.1@48.753,37.88 ; P2.1@48.13,37.511 cw(c48.13,36.62) 48.76,37.25 cw(c49.39,37.88) P2.1@48.499,37.88 ; U3.24@68.49,30.16 68.49,31.55 67.61,32.43 63.76,32.43 60.66,35.53 50.48,35.53 P2.1@48.13,37.88 46.728,37.88
TDI: P2.9 R58.1 U3.23 | length 44
  Top Layer w0.254: P2.9@57.667,37.88 ccw(c56.163,37.88) 57.226,38.944 ccw(c58.29,40.007) P2.9@58.29,38.503 ; P2.9@57.921,37.88 ccw(c57.03,37.88) 57.66,38.51 ccw(c58.29,39.14) P2.9@58.29,38.249 ; P2.9@58.29,37.88 56.96,39.21 52.48,39.21 52.05,38.78 52.05,36.84 52.9,35.99 60.94,35.99 64.01,32.92 67.85,32.92 68.99,31.78 U3.23@68.99,30.16
  Bottom Layer w0.254: R58.1@57.759,35.402 ccw(c56.064,37.097) 58.462,37.097 ; P2.9@57.849,37.439 cw(c56.372,35.962) 58.462,35.962 ; R58.1@57.939,35.222 ccw(c56.677,36.484) 58.462,36.484 ; P2.9@58.029,37.619 cw(c56.985,36.575) 58.462,36.575 ; R58.1@58.119,35.042 ccw(c57.291,35.87) 58.462,35.87 ; P2.9@58.29,37.88 58.462,37.708 R58.1@58.462,35.042 ; 58.462,36.79 cw(c59.38,36.79) P2.9@58.731,37.439
TDO: P2.3 U3.25 | length 36.1
  Top Layer w0.254: v1@46.19,36.637 cw(c46.19,36.099) 46.571,36.479 cw(c46.951,36.86) v1@46.413,36.86 ; v1(46.19,36.86) 48,35.05 60.46,35.05 63.57,31.94 67.45,31.94 67.99,31.4 U3.25@67.99,30.16
  Bottom Layer w0.254: v1@46.19,36.637 cw(c46.19,36.099) 46.571,36.479 cw(c46.951,36.86) v1@46.413,36.86 ; v1(46.19,36.86) 46.76,36.29 49.08,36.29 P2.3@50.67,37.88 ; P2.3@50.047,37.88 cw(c48.543,37.88) 49.606,36.816 cw(c50.67,35.753) P2.3@50.67,37.257 ; P2.3@50.301,37.88 cw(c49.41,37.88) 50.04,37.25 cw(c50.67,36.62) P2.3@50.67,37.511
TMS: P2.5 R57.1 U3.22 | length 34.1
  Top Layer w0.254: P2.5@53.21,37.257 cw(c53.21,35.753) 54.274,36.816 cw(c55.337,37.88) P2.5@53.833,37.88 ; P2.5@53.21,37.511 cw(c53.21,36.62) 53.84,37.25 cw(c54.47,37.88) P2.5@53.579,37.88 ; P2.5@53.21,37.88 54.63,36.46 61.14,36.46 64.19,33.41 68.06,33.41 69.49,31.98 U3.22@69.49,30.16
  Bottom Layer w0.254: R57.1@50.498,35.028 R57.1@50.498,35.448 ; R57.1@50.625,35.536 ccw(c50.625,36.574) 51.36,35.84 ; R57.1@50.879,35.028 cw(c51.68,35.028) R57.1@51.114,35.594 ; R57.1@50.968,35.448 53.21,37.69 P2.5@53.21,37.88 ; R57.1@51.133,35.028 cw(c52.548,35.028) 51.548,36.028 ; 52.012,36.492 ccw(c50.624,37.88) P2.5@52.587,37.88 ; 52.446,36.926 ccw(c51.491,37.88) P2.5@52.841,37.88 ; 52.471,36.951 cw(c53.21,36.212) P2.5@53.21,37.257
UART1_RX: C10.2 JP1.3 R13.1 U2.43 | length 25.4
  Top Layer w0.254: JP1.3@20.249,10.539 cw(c18.42,8.71) 21.007,8.71 ; JP1.3@20.249,11.421 ccw(c19.186,12.484) 20.69,12.484 ccw(c22.194,12.484) JP1.3@21.131,11.421 ; JP1.3@20.429,10.719 cw(c19.033,9.323) 21.007,9.323 ; JP1.3@20.429,11.241 ccw(c19.799,11.871) 20.69,11.871 ccw(c21.581,11.871) JP1.3@20.951,11.241 ; C10.2@20.521,14.248 cw(c20.112,13.839) 20.69,13.839 ; JP1.3@20.609,10.899 cw(c19.646,9.936) 21.007,9.936 ; R13.1@20.648,7.368 ccw(c19.781,8.235) 21.007,8.235 ccw(c22.234,8.235) R13.1@21.367,7.368 ; 20.69,12.922 cw(c22.565,12.922) C10.2@21.239,14.248 ; 20.69,13.535 cw(c21.952,13.535) C10.2@21.06,14.427 ; C10.2@20.88,14.734 20.69,14.544 JP1.3@20.69,10.98 21.007,10.663 R13.1@21.007,6.882 ; 21.007,10.242 cw(c21.428,10.242) JP1.3@21.131,10.539
  Bottom Layer w0.254: JP1.3@20.249,10.539 cw(c19.186,9.476) 20.69,9.476 cw(c22.194,9.476) JP1.3@21.131,10.539 ; JP1.3@20.429,10.719 cw(c19.799,10.089) 20.69,10.089 cw(c21.581,10.089) JP1.3@20.951,10.719
UART1_TX: C9.2 JP1.4 R12.1 U2.42 | length 24.9
  Top Layer w0.254: JP1.4@22.789,11.421 ccw(c21.726,12.484) 23.23,12.484 ccw(c24.734,12.484) JP1.4@23.671,11.421 ; JP1.4@22.969,11.241 ccw(c22.339,11.871) 23.23,11.871 ccw(c24.121,11.871) JP1.4@23.491,11.241 ; 23.23,11.804 cw(c26.573,11.804) C9.2@24.209,14.168 ; 23.23,12.417 cw(c25.96,12.417) C9.2@24.03,14.347 ; 23.23,13.03 cw(c25.347,13.03) C9.2@23.85,14.527 ; 23.23,13.643 cw(c24.734,13.643) C9.2@23.67,14.707 ; JP1.4@23.26,10.612 cw(c23.315,9.937) 23.794,10.416 cw(c24.273,10.895) JP1.4@23.598,10.95 ; JP1.4@23.28,10.359 cw(c23.373,9.218) 24.182,10.028 ; R12.1@23.823,7.368 ccw(c22.956,8.235) 24.182,8.235 ccw(c25.409,8.235) R12.1@24.542,7.368 ; JP1.4@23.851,10.93 ccw(c24.992,10.837) 24.182,10.028 ; C9.2@23.85,14.654 23.23,14.034 JP1.4@23.23,10.98 24.182,10.028 ; R12.1@24.182,6.882 24.182,10.028
UART2_RX: R9.1 U3.8 | length 17.4
  Top Layer w0.254: U3.8@76.49,30.16 76.49,32.56 78.45,34.52 78.45,37.51 78.96,38.02 84.086,38.02 R9.1@84.328,38.262 ; 82.39,38.02 ccw(c82.39,40.074) R9.1@83.842,38.622 ; 83.003,38.02 ccw(c83.003,39.461) R9.1@84.022,38.442 ; 83.56,38.02 cw(c83.56,37.621) R9.1@83.842,37.903 ; R9.1@84.18,38.38 R9.1@84.18,38.42
UART2_RX-O: P4.11 U3.36 | length 42.6
  Top Layer w0.254: P4.11@44.76,1.604 46.06,2.904 46.06,7.37 48.08,9.39 57.12,9.39 58.9,11.17 58.9,20.45 62.06,23.61 U3.36@66.44,23.61 ; P4.11@44.76,1.973 ccw(c44.76,2.864) 45.39,2.234 ccw(c46.02,1.604) P4.11@45.129,1.604 ; P4.11@44.76,2.227 ccw(c44.76,3.731) 45.823,2.668 ccw(c46.887,1.604) P4.11@45.383,1.604
UART2_TX: R7.1 U3.7 | length 14.8
  Top Layer w0.254: U3.7@76.99,30.16 76.99,32.36 80.22,35.59 83.876,35.59 R7.1@84.338,35.127 ; 82.481,35.59 cw(c82.481,33.397) R7.1@84.032,34.948 ; 83.095,35.59 cw(c83.095,34.011) R7.1@84.211,35.127 ; R7.1@83.708,35.59 cw(c83.708,34.624) R7.1@84.391,35.307
UART2_TX-O: P4.13 U3.37 | length 40.4
  Top Layer w0.254: P4.13@47.3,1.604 48.6,2.904 48.6,8.33 49.19,8.92 57.332,8.92 59.406,10.994 59.406,20.296 62.22,23.11 U3.37@66.44,23.11 ; P4.13@47.3,1.973 ccw(c47.3,2.864) 47.93,2.234 ccw(c48.56,1.604) P4.13@47.669,1.604 ; P4.13@47.3,2.227 ccw(c47.3,3.731) 48.363,2.668 ccw(c49.427,1.604) P4.13@47.923,1.604
UART3_RX: P4.12 U2.30 | length 1.4
  Top Layer w0.254: P4.12@44.499,4.405 ccw(c43.99,4.914) 44.71,4.914 ; P4.12@44.71,4.194 P4.12@44.76,4.144 ; 44.71,5.1 ccw(c45.642,5.1) P4.12@45.01,4.415
UART3_TX: P4.14 U2.29 | length 3.9
  Bottom Layer w0.254: P4.14@46.677,4.144 cw(c45.173,4.144) 46.236,3.08 cw(c47.3,2.017) P4.14@47.3,3.521 ; P4.14@46.931,4.144 cw(c46.04,4.144) 46.67,3.514 cw(c47.3,2.884) P4.14@47.3,3.775 ; P4.14@47.23,4.214 P4.14@47.3,4.144
UART4_RX: P4.25 U2.52 | length 1.4
  Top Layer w0.254: P4.25@62.171,1.604 cw(c61.28,1.604) 61.91,0.974 cw(c62.54,0.344) P4.25@62.54,1.235
UART4_TX: P4.27 U2.51 | length 3.8
  Bottom Layer w0.254: P4.27@64.457,1.604 ccw(c62.953,1.604) 64.016,2.668 ccw(c65.08,3.731) P4.27@65.08,2.227 ; P4.27@64.711,1.604 ccw(c63.82,1.604) 64.45,2.234 ccw(c65.08,2.864) P4.27@65.08,1.973
VCC3V3: C1.1 C3.1 C4.1 C5.1 C6.1 C12.1 C16.2 C17.2 C18.2 C19.2 C20.2 C21.2 C22.2 C23.2 C24.1 C27.2 CA1.1 JP1.1 JP2.23 JP2.25 JP5.1 L1.1 P1.1 P1.2 P2.4 R2.1 R12.2 R13.2 R14.2 R56.2 R57.2 R58.2 R61.2 R62.2 R63.2 R64.2 R65.2 R66.2 R67.2 U1.2 U2.1 U2.13 U2.19 U2.32 U2.48 U2.64 U3.9 U3.13 U3.31 U3.45 U3.59 U3.63 U3.80 U3.94 U4.15 U4.19 U4.20 U4.25 U4.28 U5.4 U5.5
VDD_5V: C2.1 CA2.1 JP2.21 JP2.22 P4.3 P4.4 R1.2 U1.3 | length 255.1
  Top Layer w0.5: 15.09,1.75 13.97,0.63 2.17,0.63 0.61,2.19 0.61,51.39 2.53,53.31 24.9,53.31 30.14,48.07 90.19,48.07 95.42,53.3 123.22,53.3 124.35,52.17 JP2.21@124.35,48.155 ; JP2.21@123.996,48.508 ccw(c123.143,49.362) 124.35,49.362 ccw(c125.557,49.362) JP2.21@124.704,48.508 ; JP2.22@123.996,50.341 cw(c123.143,49.487) 124.35,49.487 cw(c125.557,49.487) JP2.22@124.704,50.341 ; JP2.22@123.996,51.048 ccw(c123.143,51.902) 124.35,51.902 ccw(c125.557,51.902) JP2.22@124.704,51.048
  Top Layer w1: R1.2@4.01,16.094 9.934,16.094 U1.3@10.5,16.66 ; 7.968,16.094 ccw(c7.968,18.254) U1.3@9.496,16.727 ; U1.3@10.01,16.29 10.945,15.355 10.945,5.895 15.09,1.75 25.21,1.75 30.24,6.78 33.66,6.78 34.6,5.84 P4.3@34.6,1.604
pads on no net: P1.17 P1.19 P2.6 P2.7 P2.8 P3.3 P3.4 P3.5 P3.6 P3.22 P3.23 P3.24 P3.25 P3.27 P3.28 P3.29 P3.30 P3.31 P3.32 P3.33 P3.34 P3.35 P3.36 P3.37 P3.38 P3.39 P3.40 P3.41 P3.42 P3.43 P3.44 P3.45 P3.46 P4.5 P4.6 P4.7 P4.8 P4.9 P4.10 P4.28 P4.29 P4.30 P4.31 P4.32 P4.33 P4.34 P4.35 P4.36 P4.37 P4.38 P4.39 P4.40 P4.42 U2.3 U2.26 U2.53 U2.54 U2.57 U2.61 U2.62 U3.14 U4.3 U4.5 U5. U5.7

## Polygon pours and split planes (outlines as drawn)
GND on Top Layer "Top Layer-No Net" (solid, remove dead copper, pour order 1001): 158.39,0.24 173.08,0.24 173.58,0.74 173.58,53.3 173.15,53.73 158.67,53.73 158.29,53.35 158.29,0.34 158.39,0.24
GND on Top Layer "Top Layer-No Net" (solid, remove dead copper, pour order 1000): 0.38,0.34 157.04,0.34 157.61,0.91 157.61,53.13 157,53.74 0.94,53.74 0.3,53.1 0.3,0.42 0.38,0.34
GND on Bottom Layer "Top Layer-No Net" (solid, remove dead copper, pour order 1003): 158.51,0.27 173.28,0.27 173.51,0.5 173.51,53.45 173.18,53.78 158.55,53.78 158.22,53.45 158.22,0.56 158.51,0.27
GND on Bottom Layer "Top Layer-No Net" (solid, remove dead copper, pour order 1002): 0.34,0.27 157.28,0.27 157.71,0.7 157.71,53.34 157.33,53.72 0.71,53.72 0.26,53.27 0.26,0.35 0.34,0.27

## Keep-outs
Keep-Out Layer:
  circle w0.254: c153,5 r1.7
  circle w0.254: c5,5 r1.7
  circle w0.254: c5,49 r1.7
  circle w0.254: c153,49 r1.7
  lines w0.254: 158,0 0,0 0,54 158,54 ; 158,0 158,54 ; 158,0 172.18,0 173.7,0 173.7,54 158,54

## Silkscreen, mask and mechanical layers (free items; w line width, h text height)
Top Overlay:
  circle w0.254: c153,5 r4
  circle w0.254: c153,49 r4
  circle w0.254: c5,5 r4
  circle w0.254: c5,49 r4

## Dimensions
0,54 to 0,0 on Keep-Out Layer
0,54 to 158,54 on Keep-Out Layer
158,54 to 173.7,54 on Keep-Out Layer

## Text inside footprints (layer, text, board x,y; h text height)
JP1: Top Overlay "1" at 13.16,10.3 h1 r180; Top Overlay "6" at 31.22,12.54 h1 r180
JP2: Top Overlay "32" at 139.61,51.7 h1; Top Overlay "31" at 139.78,46.54 h1; Top Overlay "20" at 115.13,51.31 h1; Top Overlay "19" at 114.82,46.65 h1; Top Overlay "2" at 95.7,51.52 h1; Top Overlay "1" at 96.02,46.96 h1
JP5: Top Overlay "8" at 160.99,49.36 h1 r180; Top Overlay "7" at 160.46,52.16 h1; Top Overlay "1" at 172.5,52 h1; Top Overlay "2" at 172.07,48.12 h1
P2: Top Overlay "10" at 57.78,42.18 h1; Top Overlay "9" at 58.8,35.3 h1; Top Overlay "1" at 47.3,35.14 h1; Top Overlay "2" at 47.32,42.11 h1
P3: Top Overlay "45" at 89.591,49.352 h1; Top Overlay "46" at 89.591,51.892 h1; Top Overlay "1" at 29.52,49.352 h1; Top Overlay "2" at 29.52,51.892 h1
P4: Top Overlay "45" at 89.591,1.096 h1; Top Overlay "46" at 89.591,3.636 h1; Top Overlay "1" at 29.52,1.096 h1; Top Overlay "2" at 29.52,3.636 h1